# Altium PCB PCB3.PcbDoc
Units mm, origin at the board's own origin, x right, y up, seen from the top; angles counter-clockwise.
Board outline 85.6 x 53.98 mm, 2 copper layers (Top Layer, Bottom Layer); 38 components, 37 nets, 141 pads, 95 vias.
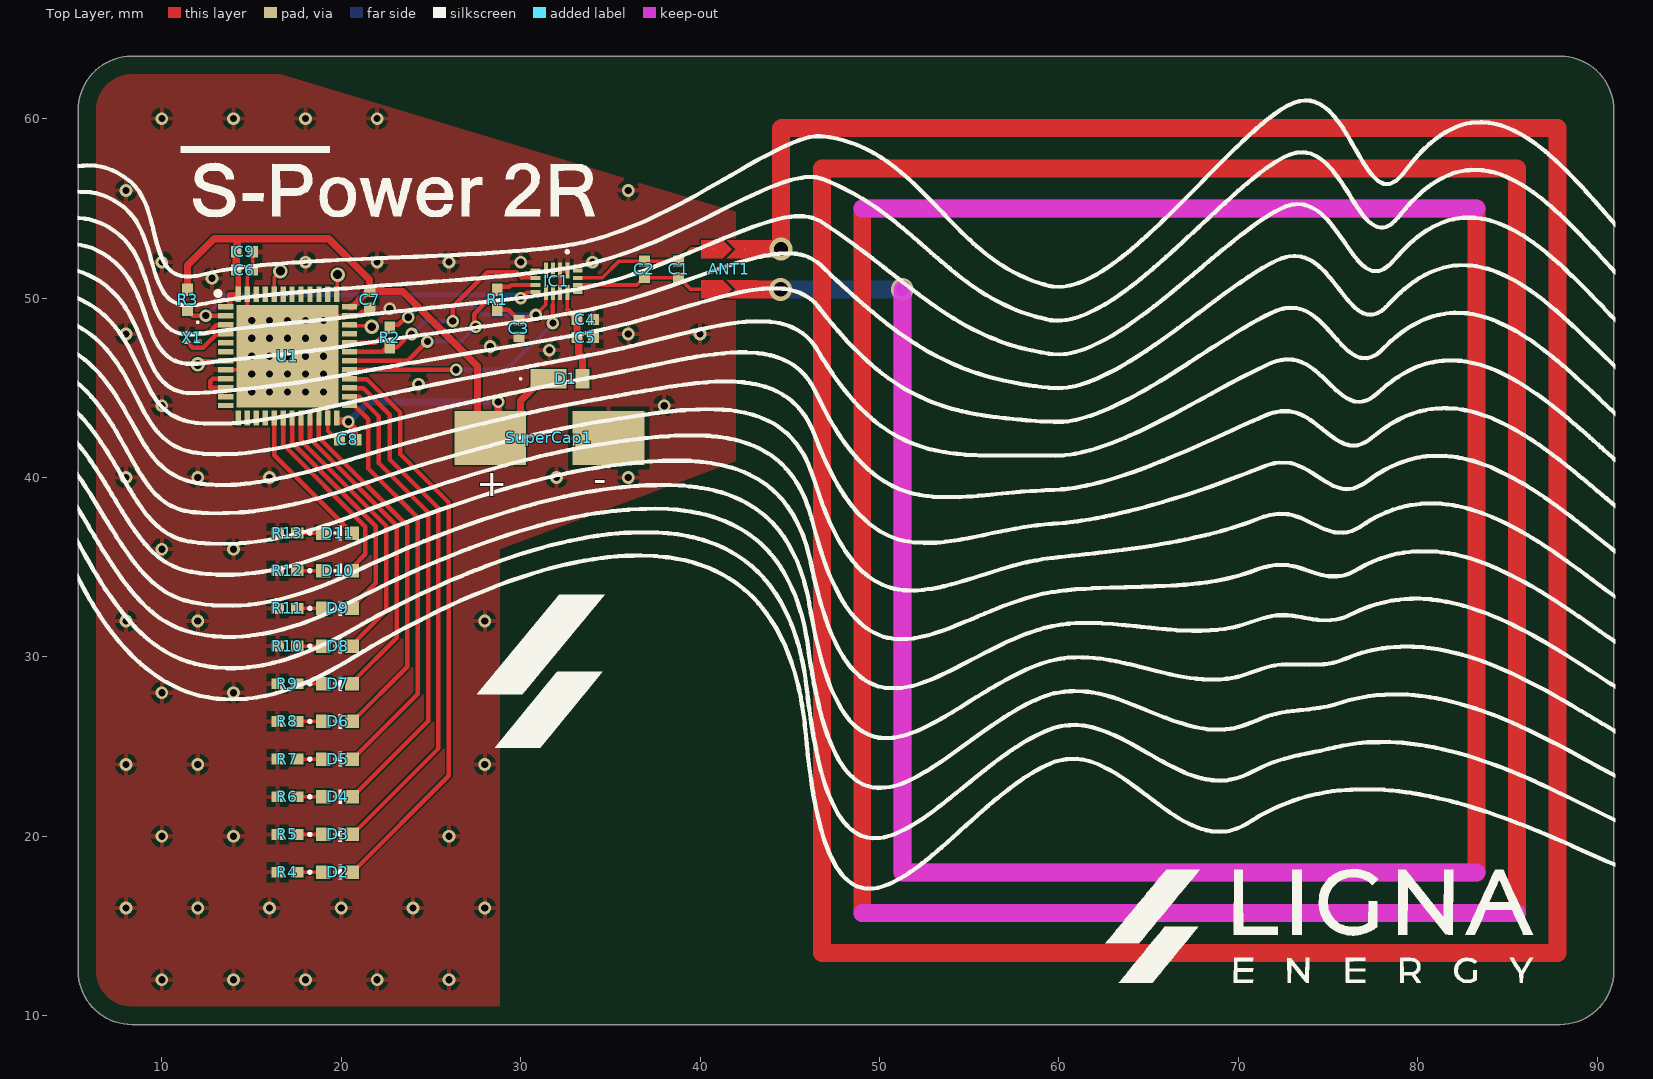
[diagram p0: Top Layer view]
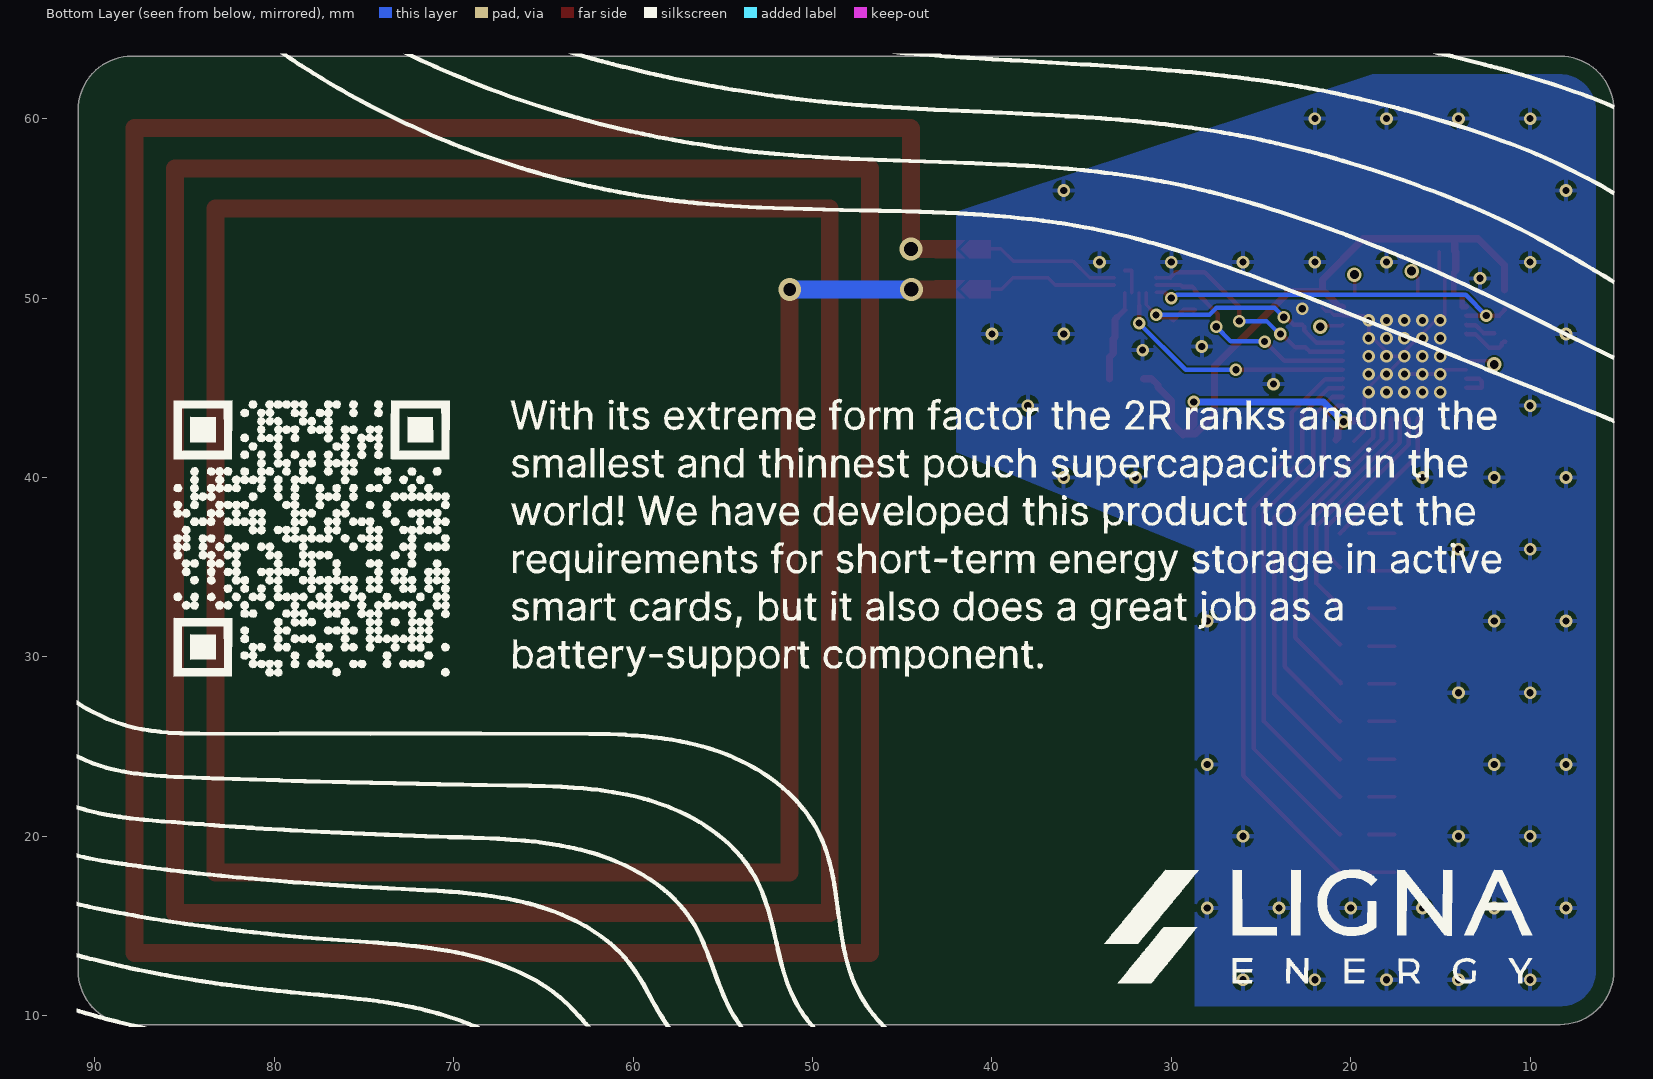
[diagram p1: Bottom Layer view, seen from below]

## Layer stack, top to bottom
Top Solder: solder mask 0.0102, Solder Resist, Dk 3.5
Top Layer: signal copper 0.0356
Dielectric 1: dielectric 0.32, FR-4, Dk 4.8
Bottom Layer: signal copper 0.0356
Bottom Solder: solder mask 0.0102, Solder Resist, Dk 3.5

## Board outline
8.334,9.503 cw(c8.334,12.503) 5.334,12.503 5.334,60.483 cw(c8.334,60.483) 8.334,63.483 87.934,63.483 cw(c87.934,60.483) 90.934,60.483 90.934,12.503 cw(c87.934,12.503) 87.934,9.503

## Design rules (kind name [scope] priority, off if disabled: settings)
BoardOutlineClearance [All] p1: gap=1 ignorepadtopadclearanceinfootprint=FALSE
Clearance [All] p1: gap=0.1 ignorepadtopadclearanceinfootprint=TRUE
PolygonConnect [All] p1: connectstyle=Relief reliefconductorwidth=0.254 reliefentries=4 polygonreliefangle="90 Angle" airgapwidth=0.254
RoutingVias [All] p1: holewidth=0.711 width=1.27 viastyle="Through Hole" minholewidth=0.4 minwidth=0.7 maxholewidth=0.711 maxwidth=1.7
SolderMaskExpansion [All] p1: expansion=0.102 istentingtop=FALSE
Width [All] p1: maxlimit=0.4 minlimit=0.1 preferedwidth=0.254
30 further rules are at their usual default settings.

## Components (designator, comment, footprint, x,y, rotation, side; value= is the part's Value field where it differs from the comment)
ANT1 "NFC-antenna" antenna3 40.789,59.481 r0 top
C1 "GRM155C81C474KE01D" CAPC1005X70N 38.8,51.6 r270 top value=0F
C2 "GRM155C81C474KE01D" CAPC1005X70N 36.9,51.6 r270 top value=0F
C3 "GRM155R61E105KA12D" CAPC1005X55N 29.9,48.3 r270 top value=1µF
C4 "C0402C101KCGACAUTO" CAPC1005X70N 33.6,48.8 r180 top
C5 "C0402C101KCMBASJ105SB7474KFNA01GACAUTO" CAPC1005X70N 33.6,47.8 r180 top
C6 "C0402C475K8PACTU" CAPC1005X70N 14.605,51.562 r0 top
C7 "MLAST105SB5104KFNA01" CAPC1005X70N 21.59,49.911 r270 top
C8 "MLAST105SB5104KFNA01" CAPC1005X70N 20.36,42.1 r180 top
C9 "MLAST105SB5104KFNA01" CAPC1005X70N 14.605,52.578 r0 top
D1 "RBE01VYM6AFHTR" RBE01VYM6AFHTR 32.2,45.5 r270 top
D2 "150060RS55040" WL-SMCD_0603 1289.8,1288 r0 top
D3 "150060RS55040" WL-SMCD_0603 1289.8,1290.1 r0 top
D4 "150060AS55040" WL-SMCD_0603 1289.8,1292.2 r0 top
D5 "150060AS55040" WL-SMCD_0603 1289.8,1294.3 r0 top
D6 "150060AS55040" WL-SMCD_0603 1289.8,1296.4 r0 top
D7 "150060VS55040" WL-SMCD_0603 1289.8,1298.5 r0 top
D8 "150060VS55040" WL-SMCD_0603 1289.8,1300.6 r0 top
D9 "150060VS55040" WL-SMCD_0603 1289.8,1302.7 r0 top
D10 "150060VS55040" WL-SMCD_0603 1289.8,1304.8 r0 top
D11 "150060BS55040" WL-SMCD_0603 1289.8,1306.9 r0 top
IC1 "NTP53321G0JHKZ" NTP53321G0JHKZ 32.004,50.927 r270 top
R1 "CRCW04024K70FKEDHP" RESC1005X40N 28.7,49.9 r270 top
R2 "CRCW04024K70FKEDHP" RESC1005X40N 22.7,47.8 r90 top
R3 "CRCW04024K70FKEDHP" RESC1005X40N 11.43,49.911 r90 top
R4 "SFR01MZPJ470" RESC1005X40N 17,18 r0 top
R5 "SFR01MZPJ470" RESC1005X40N 17,20.1 r0 top
R6 "SFR01MZPJ470" RESC1005X40N 17,22.2 r180 top
R7 "SFR01MZPJ470" RESC1005X40N 17,24.3 r180 top
R8 "SFR01MZPJ470" RESC1005X40N 17,26.4 r180 top
R9 "SFR01MZPJ470" RESC1005X40N 17,28.5 r180 top
R10 "SFR01MZPJ470" RESC1005X40N 17,30.6 r180 top
R11 "SFR01MZPJ470" RESC1005X40N 17,32.7 r180 top
R12 "SFR01MZPJ470" RESC1005X40N 17,34.8 r180 top
R13 "SFR01MZPJ470" RESC1005X40N 17,36.9 r180 top
SuperCap1 "Ligna Energy" "S-Power 2R slim" 31.3,40.2 r0 top locked
U1 "STM32L431CCU6" QFN50P700X700X60-49N-D 17.006,46.757 r0 top locked
X1 "WMRAG32K76CS2C00R0" WMRAG32K76CS2C00R0 11.7,47.8 r180 top

## Footprints (in the part's own frame and the unit in brackets; to place one, negate y for a bottom-side part, rotate by r counter-clockwise, add the part's x,y. Pads: shape width x height; smd on the part's side, far side on the other; paste and mask are expansions set on the pad)
antenna3 [mm]
  round 0.025 smd: 0(1.7,-9) 0(1.7,-6.75) 1(-0.025,-6.75) 2(-0.025,-9)
  Top Layer region: -0.725,-6.25 -0.725,-7.25 0.475,-7.25 0.975,-6.75 0.475,-6.25
  Top Layer region: 2.4,-7.25 2.4,-6.25 0.7,-6.25 1.2,-6.75 0.7,-7.25
  Top Layer region: -0.725,-8.5 -0.725,-9.5 0.475,-9.5 0.975,-9 0.475,-8.5
  Top Layer region: 2.4,-9.5 2.4,-8.5 0.7,-8.5 1.2,-9 0.7,-9.5
  Top Layer lines w1: 1.7,-9 3.7,-9 ; 1.725,-6.75 3.725,-6.75 3.725,-0.025 ; 3.75,0 47,0 47,-46 6,-46 6,-2.25 44.75,-2.25 44.75,-43.75 8.25,-43.75 8.25,-4.5 42.5,-4.5 42.5,-41.5 10.5,-41.5 10.5,-9
  Top Layer keep-out lines w1: 8.25,-43.75 44.75,-43.75 ; 8.25,-4.5 42.5,-4.5 ; 10.5,-9 10.5,-41.5 42.5,-41.5
  Bottom Layer lines w1: 3.7,-9 10.475,-9
CAPC1005X55N [mm]
  rect 0.6x0.62 smd: 1(-0.46,0) 2(0.46,0)
  body extent -0.5,-0.25 0.5,0.25, height 0.25
CAPC1005X70N [mm]
  rect 0.6x0.62 smd: 1(-0.46,0) 2(0.46,0)
  body extent -0.5,-0.25 0.5,0.25, height 0.5
NTP53321G0JHKZ [mm]
  rect 0.9x0.22 smd: 1(-0.6,0.6)
  rect 0.85x0.22 smd: 2(-0.625,0.2) 3(-0.625,-0.2) 4(-0.625,-0.6) 9(0.625,-0.6) 10(0.625,-0.2) 11(0.625,0.2) 12(0.625,0.6)
  rect 0.22x0.55 smd: 5(-0.6,-1.175) 6(-0.2,-1.175) 7(0.2,-1.175) 8(0.6,-1.175) 13(0.6,1.175) 14(0.2,1.175) 15(-0.2,1.175) 16(-0.6,1.175)
  silkscreen extent -1.7,0.55 -1.6,0.65, body extent -0.9,-1.3 0.9,1.3, height 0.6
QFN50P700X700X60-49N-D [mm]
  rect 0.85x0.3 smd: 1(-3.45,2.75) 2(-3.45,2.25) 3(-3.45,1.75) 4(-3.45,1.25) 5(-3.45,0.75) 6(-3.45,0.25) 7(-3.45,-0.25) 8(-3.45,-0.75) 9(-3.45,-1.25) 10(-3.45,-1.75) 11(-3.45,-2.25) 12(-3.45,-2.75) 25(3.45,-2.75) 26(3.45,-2.25) 27(3.45,-1.75) 28(3.45,-1.25) 29(3.45,-0.75) 30(3.45,-0.25) 31(3.45,0.25) 32(3.45,0.75) 33(3.45,1.25) 34(3.45,1.75) 35(3.45,2.25) 36(3.45,2.75)
  rect 0.3x0.85 smd: 13(-2.75,-3.45) 14(-2.25,-3.45) 15(-1.75,-3.45) 16(-1.25,-3.45) 17(-0.75,-3.45) 18(-0.25,-3.45) 19(0.25,-3.45) 20(0.75,-3.45) 21(1.25,-3.45) 22(1.75,-3.45) 23(2.25,-3.45) 24(2.75,-3.45) 37(2.75,3.45) 38(2.25,3.45) 39(1.75,3.45) 40(1.25,3.45) 41(0.75,3.45) 42(0.25,3.45) 43(-0.25,3.45) 44(-0.75,3.45) 45(-1.25,3.45) 46(-1.75,3.45) 47(-2.25,3.45) 48(-2.75,3.45)
  rect 5.7x5.7 smd: 49(0,0)
  silkscreen extent -4,3.38 -3.75,3.62, body extent -3.55,-3.55 3.55,3.55, height 0.6
RBE01VYM6AFHTR [mm]
  rect 1.1x2 smd: 1(0,-0.65)
  rect 1.1x0.8 smd: 2(0,1.25)
  silkscreen extent -0.05,-2.25 0.05,-2.15, body extent -0.7,-1.25 0.7,1.25, height 0.8
RESC1005X40N [mm]
  rect 0.7x0.6 smd: 1(-0.55,0) 2(0.55,0)
  body extent -0.5,-0.25 0.5,0.25, height 0.4
"S-Power 2R slim" [mm]
  rect 4x3 smd: 1(-3,2) 2(3.6,2)
  silkscreen extent -3.72,-15.26 3.38,-6.73
WL-SMCD_0603 [mm] "SMD Mono-color Chip LED, body 1.6x0.8mm"
  rect 0.8x0.75 smd: 1(-1270.8,-1270) 2(-1269.2,-1270)
  silkscreen extent -1271.62,-1270.4 -1269.78,-1269.6, body extent -1270.8,-1270.4 -1269.2,-1269.6, height 0.42
WMRAG32K76CS2C00R0 [mm]
  rect 0.4x0.25 smd: 1(-0.3,-0.225) 2(0.3,-0.225) 3(0.3,0.225) 4(-0.3,0.225)
  silkscreen extent -0.35,-0.9 -0.25,-0.8, body extent -0.48,-0.33 0.48,0.33, height 0.45

## Part data
C1 C2: library part CMP-001-00140-1, "Multilayer Ceramic Capacitors MLCC - SMD/SMT", Manufacturer_Name="Murata Electronics", Mouser Part Number=81-GRM155C81C474KE1D, Datasheet Link=https://search.murata.co.jp/Ceramy/image/img/A01X/G101/ENG/GRM155C81C474KE01-01A.pdf, Design Item ID=GRM155C81C474KE01D, Height=0.7mm, Manufacturer_Part_Number=GRM155C81C474KE01D, Mouser Price/Stock=https://www.mouser.com/Search/Refine.aspx?Keyword=81-GRM155C81C474KE1D, Source=SamacSys.SchLib
C3: library part CMP-001-00126-1, "Capacitor", Manufacturer_Name="Murata Electronics", Mouser Part Number=81-GRM155R61E105KA2D, Rated Voltage="25 VDC", Arrow Part Number=GRM155R61E105KA12D, Arrow Price/Stock=https://www.arrow.com/en/products/grm155r61e105ka12d/murata-manufacturing?region=nac, Datasheet Link=https://search.murata.co.jp/Ceramy/image/img/A01X/G101/ENG/GRM155R61E105KA12-01A.pdf, Design Item ID=GRM155R61E105KA12D, Height=0.55mm, Manufacturer_Part_Number=GRM155R61E105KA12D, Mouser Price/Stock=https://www.mouser.co.uk/ProductDetail/Murata-Electronics/GRM155R61E105KA12D?qs=hiffU4J9V6bE4a81t2Mv5A%3D%3D, Source=SamacSys.SchLib
C4: library part "Generic capacitor", "Multilayer Ceramic Capacitors MLCC - SMD/SMT 500V 0.0001uF C0G 0402 10% AEC-Q200", Capacitance=100pF, ComponentLink1Description="New link", ComponentLink1URL=https://www.mouser.se/ProductDetail/KEMET/C0402C101KCGACAUTO?qs=1Kr7Jg1SGW8kQysZZQPmCw%3D%3D
C5: library part "Generic capacitor", "Multilayer Ceramic Capacitors MLCC - SMD/SMT 500V 0.0001uF C0G 0402 10% AEC-Q200", Capacitance=0.47uF, ComponentLink1Description="New link", ComponentLink1URL=https://www.mouser.se/ProductDetail/TAIYO-YUDEN/MBASJ105SB7474KFNA01?qs=tlsG%2FOw5FFh70%252Bw5vm%252Bxgg%3D%3D
C6: library part "Generic capacitor", "Multilayer Ceramic Capacitors MLCC - SMD/SMT", Capacitance=4.7uF, ComponentLink1Description="New link", ComponentLink1URL=https://www.mouser.se/ProductDetail/TAIYO-YUDEN/MLASJ105BB5475MFNA01?qs=sGAEpiMZZMsh%252B1woXyUXj3XUfju0vRpjpyIV14TsoXE%3D
C7 C8 C9: library part "Generic capacitor", "Multilayer Ceramic Capacitors MLCC - SMD/SMT 25V 0.1uF X5R 0402 10% Medical", Capacitance=100nF, ComponentLink1Description="New link", ComponentLink1URL=https://www.mouser.se/ProductDetail/TAIYO-YUDEN/MLAST105SB5104KFNA01?qs=sGAEpiMZZMsh%252B1woXyUXj3XUfju0vRpjIEu19pL458I%3D
D1: library part CMP-004-00062-1, "DIODE SCHOTTKY 6V 100MA TUMD2M", Manufacturer_Name="ROHM Semiconductor", Mouser Part Number=755-RBE01VYM6AFHTR, Datasheet Link=https://www.digikey.ph/en/products/detail/rohm-semiconductor/RBE01VYM6AFHTR/24634517, Design Item ID=RBE01VYM6AFHTR, Height=0.8mm, Manufacturer_Part_Number=RBE01VYM6AFHTR, Mouser Price/Stock=https://www.mouser.co.uk/ProductDetail/ROHM-Semiconductor/RBE01VYM6AFHTR?qs=VVKQmw408U8czvswzPLZtQ%3D%3D, Source=SamacSys.SchLib
D2 D3: library part CMP-207942-000007-3, "LED RED DIFFUSED 0603 SMD", Case/Package=0603, Color=Red, Forward Current=40mA, Forward Voltage=2V, Max Junction Temperature (Tj)=115°C, Max Operating Temperature=85°C, Max Reverse Voltage (DC)=5V, Min Operating Temperature=-40°C, Power Dissipation=48mW, Dominant Wavelength=624nm, Height=400µm, Length=1.6mm, Luminous Intensity=90mcd, NexarPartId=90235565, Packaging="Tape and Reel", Peak Wavelength=632nm, Reverse Voltage=5V, RoHS=Compliant, Viewing Angle=140°, Wavelength=624nm, Width=800µm
D4 D5 D6: library part CMP-03913-134708025-1, "150060AS55040 WL-SMCD SMT Mono-color Chip LED Diffused", Forward Current=40mA, Forward Voltage=2V, Max Operating Temperature=85°C, Max Reverse Voltage (DC)=5V, Min Operating Temperature=-40°C, Dominant Wavelength=605nm, Luminous Intensity=110mcd, NexarPartId=134708025, Peak Wavelength=609nm, Viewing Angle=140°
D7 D8 D9 D10: library part CMP-03913-90235568-2, "150060VS55040 WL-SMCD SMT Mono-color Chip LED Diffused", Case/Package=0603, Color=Green, Forward Current=40mA, Forward Voltage=2V, Max Junction Temperature (Tj)=115°C, Max Operating Temperature=85°C, Max Reverse Voltage (DC)=5V, Min Operating Temperature=-40°C, Power Dissipation=48mW, Dominant Wavelength=573nm, Height=400µm, Length=1.6mm, Luminous Intensity=60mcd, NexarPartId=90235568, Packaging="Tape and Reel", Peak Wavelength=575nm, Reverse Voltage=5V, RoHS=Compliant, Viewing Angle=140°, Wavelength=573nm, Width=800µm
D11: library part CMP-03913-90235561-2, "150060BS55040 WL-SMCD SMT Mono-color Chip LED Diffused", Forward Current=60mA, Forward Voltage=3.2V, Max Operating Temperature=85°C, Max Reverse Voltage (DC)=5V, Min Operating Temperature=-40°C, Dominant Wavelength=470nm, Height=400µm, Length=1.6mm, Luminous Intensity=80mcd, NexarPartId=90235561, Packaging="Tape and Reel", Peak Wavelength=465nm, RoHS=Compliant, Viewing Angle=140°, Wavelength=470nm, Width=800µm
IC1: library part CMP-031-00011-1, "Interface - Specialized NTAG", Manufacturer_Name=NXP, Mouser Part Number=771-NTP53321G0JHKZ, Arrow Part Number=NTP53321G0JHKZ, Arrow Price/Stock=https://www.arrow.com/en/products/ntp53321g0jhkz/nxp-semiconductors?region=nac, Datasheet Link=https://www.nxp.com/docs/en/data-sheet/NTP53x2.pdf, Design Item ID=NTP53321G0JHKZ, Height=0.5mm, Manufacturer_Part_Number=NTP53321G0JHKZ, Mouser Price/Stock=https://www.mouser.co.uk/ProductDetail/NXP-Semiconductors/NTP53321G0JHKZ?qs=u16ybLDytRYy2Rt%2Fib73Dw%3D%3D, Source=SamacSys.SchLib
R1 R2 R3: library part CMP-009-00230-1, "CRCW Power Resistor 0402 0.063W 4K7 Vishay CRCW Series Thick Film Power Resistor 0402 Case 4.7k +/-1% 0.125W +/-100ppm/K", Manufacturer_Name=Vishay, Mouser Part Number=71-CRCW04024K70FKEDH, Resistance=4.7k, Arrow Part Number=CRCW04024K70FKEDHP, Arrow Price/Stock=https://www.arrow.com/en/products/crcw04024k70fkedhp/vishay?utm_currency=USD&region=nac, Datasheet Link=http://www.vishay.com/docs/20035/dcrcwe3.pdf, Design Item ID=CRCW04024K70FKEDHP, Height=0.4mm, Manufacturer_Part_Number=CRCW04024K70FKEDHP, Mouser Price/Stock=https://www.mouser.co.uk/ProductDetail/Vishay-Dale/CRCW04024K70FKEDHP?qs=k2%2FDWSARqgH3ASlI4vM3KQ%3D%3D, Source=SamacSys.SchLib
R4 R5 R6 R7 R8 R9 R10 R11 R12 R13: library part "Generic resistor", "Thick Film Resistors Sulfur Tolerant Chip Resistors 0402 case size", Resistance=47, ComponentLink1Description="New link", ComponentLink1URL=https://www.mouser.se/ProductDetail/ROHM-Semiconductor/SFR01MZPJ470?qs=sGAEpiMZZMvdGkrng054t2cqbZCzJY7NKh3gUwXOa5kuN5TNJ%252Bi2TA%3D%3D
SuperCap1: library part "S-Power 2R"
U1: library part CMP-031-00018-1, "ARM Microcontrollers - MCU 16/32-BITS MICROS", Manufacturer_Name=STMicroelectronics, Mouser Part Number=511-STM32L431CCU6, Arrow Part Number=STM32L431CCU6, Arrow Price/Stock=https://www.arrow.com/en/products/stm32l431ccu6/stmicroelectronics?region=nac, Datasheet Link=http://www.st.com/content/ccc/resource/technical/document/datasheet/group3/83/b3/60/f6/b1/cc/47/7e/DM00257211/files/DM00257211.pdf/jcr:content/translations/en.DM00257211.pdf, Design Item ID=STM32L431CCU6, Height=0.6mm, Manufacturer_Part_Number=STM32L431CCU6, Mouser Price/Stock=https://www.mouser.co.uk/ProductDetail/STMicroelectronics/STM32L431CCU6?qs=U58vgkJzipRWiXTJcDrRbg%3D%3D, Source=SamacSys.SchLib
X1: library part CMP-003-00031-1, "32.768 kHz +/-20ppm Crystal 8pF 75 kOhms 4-SMD", Manufacturer_Name="Murata Electronics", Mouser Part Number=81-WMRAG32K76CS2C00R, Datasheet Link=https://www.murata.com/products/productdata/8804604674078/SPEC-WMRAG32K76CS2C00R0.pdf, Design Item ID=WMRAG32K76CS2C00R0, Height=0.35mm, Manufacturer_Part_Number=WMRAG32K76CS2C00R0, Mouser Price/Stock=https://www.mouser.co.uk/ProductDetail/Murata-Electronics/WMRAG32K76CS2C00R0?qs=bZr6mbWTK5kWV2uyypDEfg%3D%3D, Source=SamacSys.SchLib

## Via types
v1: diameter 0.711, hole 0.4, Top Layer to Bottom Layer, tented both sides, 48 vias
v2: diameter 0.7, hole 0.4, Top Layer to Bottom Layer, tented both sides, 40 vias
v3: diameter 0.8, hole 0.5, Top Layer to Bottom Layer, 4 vias
v4: diameter 1.27, hole 0.8, Top Layer to Bottom Layer, 2 vias
v5: diameter 1.27, hole 0.711, Top Layer to Bottom Layer, tented both sides, 1 vias

## Nets (pads, with @x,y where several pads share a name; then routed paths per layer and width w, separated by ;. In a path a pad name is that pad's centre, name@x,y a point inside that pad or via, vN(x,y) a via of type N, cw(c..) or ccw(c..) an arc to the next point about the centre after c; other vN are vias at no path point)
A_en: U1.9 U1.10 | length 2.1
  Top Layer w0.25: U1.10 12.707,45.007 12.7,45 12.7,45.361 12.846,45.507 U1.9
ANT+: ANT1.2 C1.2 C2.2 IC1.14 | length 8
  Top Layer w0.2: IC1.14 36.477,50.727 36.89,51.14 C2.2 C1.2 38.81,51.14 39.45,50.5 40.7,50.5
ANT-: ANT1.1 C1.1 C2.1 IC1.15 | length 8.2
  Top Layer w0.2: IC1.15 34.55,51.127 35.484,52.06 C2.1 C1.1 38.81,52.06 39.5,52.75 40.725,52.75
BOOT0: U1.44 | length 1.4
  Top Layer w0.2: U1.44 16.256,51.156 v3(16.6,51.5)
D0: D2.2 U1.28 | length 32.6
  Top Layer w0.254: U1.28 20.479,45.484 21.416,45.484 23.3,43.6 23.3,41.3 26,38.6 26,23.375 20.625,18 D2.2
D1: D3.2 U1.27 | length 29.4
  Top Layer w0.254: U1.27 20.479,44.984 21.216,44.984 22.7,43.5 22.7,41 25.418,38.282 25.418,24.893 20.625,20.1 D3.2
D2: D4.2 U1.26 | length 26.2
  Top Layer w0.254: U1.26 20.479,44.484 21.016,44.484 22.1,43.4 22.1,40.8 24.836,38.064 24.836,26.411 D4.2@20.625,22.2 ; D4.2@20.625,22.2 D4.2 D4.2@20.625,22.2
D3: D5.2 U1.25 | length 23
  Top Layer w0.254: U1.25 20.731,44.007 21.5,43.238 21.5,40.5 24.255,37.745 24.255,27.93 20.625,24.3 D5.2
D4: D6.2 U1.22 | length 20.2
  Top Layer w0.254: U1.22 18.756,42.217 23.673,37.3 23.673,29.448 20.625,26.4 D6.2
D5: D7.2 U1.21 | length 17.8
  Top Layer w0.254: U1.21 18.256,42.152 23.091,37.317 23.091,31.066 D7.2@20.625,28.6 ; D7.2@20.562,28.537 D7.2@20.625,28.6 ; D7.2@20.6,28.6 D7.2@20.625,28.6
D6: D8.2 U1.20 | length 15.4
  Top Layer w0.254: U1.20 17.756,42.044 22.509,37.291 22.509,32.584 20.625,30.7 D8.2@20.6,30.7
D7: D9.2 U1.19 | length 13
  Top Layer w0.254: U1.19 17.256,41.944 17.27,41.944 21.928,37.286 21.928,34.114 ; D9.2@20.6,32.8 20.625,32.8 20.873,33.048 20.873,33.073 21.914,34.114
D8: D10.2 U1.18 | length 10.5
  Top Layer w0.254: U1.18 16.756,41.844 21.346,37.254 21.346,35.721 20.625,35 D10.2@20.6,35
D9: D11.2 U1.17 | length 8.2
  Top Layer w0.254: U1.17 16.256,41.244 20.327,37.173 20.327,37.148 20.575,36.9 D11.2
ED: IC1.8 R3.1 U1.2 | length 21.3
  Top Layer w0.2: 30.373,50.327 IC1.8
  Top Layer w0.254: R3.1 11.43,49.311 11.734,49.007 U1.2 ; v2(30,50) 30.046,50 30.339,50.293
  Bottom Layer w0.254: v2(12.446,49.022) 13.597,50.173 29.706,50.173 29.879,50 v2(30,50)
EH: C4.2 C5.2 D1.2 IC1.12 | length 5.2
  Top Layer w0.2: 32.604,49.336 IC1.12
  Top Layer w0.3: 32.604,49.336 C4.2@33.03,48.91
  Top Layer w0.4: C4.2@33.03,48.91 33.04,48.91 33.14,48.81 C4.2 C5.2 33.24,47.7 33.24,46.91 33.45,46.7 D1.2
GND: C3.2 C4.1 C5.1 C6.2 C7.2 C8.2 C9.2 IC1.1 IC1.2 IC1.11 R4.1 R5.1 R6.2 R7.2 R8.2 R9.2 R10.2 R11.2 R12.2 R13.2 SuperCap1.2 U1.8 U1.23 U1.35 U1.47 U1.49 X1.2 | length 23.9
  Top Layer w0.2: U1.8 14.756,46.007 v2(15.006,45.757) ; U1.49@15.006,45.764 U1.49@16.762,45.764 ; v2(15.006,48.757) 14.756,49.007 14.756,51.243 15.065,51.552 C6.2 C9.2 ; U1.49@15.262,48.764 U1.49@17.138,46.889 ; U1.49@17.881,46.883 U1.49@18.881,47.883 ; v2(18.006,45.757) v2(17.006,46.757) v2(18.006,46.757) ; U1.49@18.138,45.889 U1.49@19.138,44.889 ; v2(19.006,44.757) 19.256,44.507 19.256,42.584 C8.2@19.64,42.2 ; v2(19.006,47.757) v2(19.006,48.757) 19.256,49.007 U1.35 20.506,49.057 20.943,49.057 21.146,49.26 21.399,49.26 C7.2 ; C8.2@19.64,42.21 C8.2@19.64,42.2 ; C8.2@19.82,42.02 C8.2@19.64,42.2 ; IC1.11 IC1.2@32.204,51.547 ; IC1.2 IC1.2@32.204,51.547 ; IC1.1 32.594,51.537 32.214,51.537 IC1.2@32.204,51.547
  other v1: 10,12 14,12 18,12 22,12 26,12 8,16 12,16 16,16 20,16 24,16 28,16 10,20 14,20 26,20 8,24 12,24 28,24 10,28 14,28 8,32 12,32 28,32 10,36 14,36 8,40 12,40 16,40 32,40 36,40 10,44 38,44 24.3,45.2 8,48 36,48 40,48 12.8,51.1 10,52 18,52 22,52 26,52 30,52 34,52 8,56 36,56 10,60 14,60 18,60 22,60
  other v2: 15.006,44.757 16.006,44.757 17.006,44.757 18.006,44.757 16.006,45.757 17.006,45.757 19.006,45.757 15.006,46.757 16.006,46.757 19.006,46.757 31.6,47.1 28.3,47.3 15.006,47.757 16.006,47.757 17.006,47.757 18.006,47.757 16.006,48.757 17.006,48.757 18.006,48.757 22.7,49.4
HPD: IC1.10 U1.29 | length 14.1
  Top Layer w0.15: 31.8,49.6 31.804,49.604 IC1.10
  Top Layer w0.25: U1.29 20.46,46.003 26.397,46.003 v2(26.4,46) ; v2(31.8,48.6) 31.8,49.6
  Bottom Layer w0.25: v2(26.4,46) 29.2,46 v2(31.8,48.6)
JTCK-SWCLK: U1.37 | length 1.1
  Top Layer w0.2: U1.37 19.778,50.229 19.778,51.278 v3(19.8,51.3)
JTMS-SWDIO: U1.34 | length 1.3
  Top Layer w0.2: U1.34 20.506,48.457 21.643,48.457 v3(21.7,48.4)
NetD2_1: D2.1 R4.2 | length 1.4
  Top Layer w0.2: R4.2 D2.1
NetD3_1: D3.1 R5.2 | length 1.4
  Top Layer w0.2: R5.2 D3.1
NetD4_1: D4.1 R6.1 | length 1.4
  Top Layer w0.2: R6.1 D4.1
NetD5_1: D5.1 R7.1 | length 1.4
  Top Layer w0.2: R7.1 D5.1
NetD6_1: D6.1 R8.1 | length 1.4
  Top Layer w0.2: R8.1 D6.1
NetD7_1: D7.1 R9.1 | length 1.4
  Top Layer w0.2: R9.1 D7.1
NetD8_1: D8.1 R10.1 | length 1.4
  Top Layer w0.2: R10.1 D8.1
NetD9_1: D9.1 R11.1 | length 1.4
  Top Layer w0.2: R11.1 D9.1
NetD10_1: D10.1 R12.1 | length 1.4
  Top Layer w0.2: R12.1 D10.1
NetD11_1: D11.1 R13.1 | length 1.4
  Top Layer w0.2: R13.1 D11.1
NetP_0: U1.7 | length 1.6
  Top Layer w0.2: v3(12,46.3) 12.207,46.507 U1.7
NFC_Vcc: C3.1 IC1.9 R1.2 R2.2 U1.32 | length 15.5
  Top Layer w0.2: v2@30.874,49.226 31.011,49.226 31.404,49.619 IC1.9
  Top Layer w0.254: U1.32 21.912,47.507 22.481,48.077 22.481,48.081 22.602,48.202 22.602,48.402 22.702,48.502 23.181,48.502 23.611,48.931 v2(23.731,48.931) ; R1.2@28.761,49.289 R1.2 29.31,49.35 29.717,48.943 29.717,48.933 29.89,48.76 C3.1 30.067,48.927 30.591,48.927 30.727,49.062 v2(30.847,49.062)
  Bottom Layer w0.254: v2(23.731,48.931) 24.25,49.45 27.484,49.45 27.872,49.062 v2(30.847,49.062)
SCL1: IC1.7 R1.1 U1.30 | length 12.7
  Top Layer w0.2: 29.464,50.727 IC1.7
  Top Layer w0.25: U1.30 23.707,46.507 24.771,47.571 v2(24.8,47.571) ; v2(27.5,48.4) 27.4,48.5 27.4,49.1 28.7,50.4 28.7,50.5 28.838,50.638 29.375,50.638 29.464,50.727
  Bottom Layer w0.25: v2(24.8,47.571) 24.829,47.6 26.7,47.6 v2(27.5,48.4)
SDA1: IC1.6 R2.1 U1.31 | length 12.8
  Top Layer w0.2: 30.058,51.142 IC1.6@30.814,51.142
  Top Layer w0.25: U1.31 22.275,47.007 22.5,47.232 22.5,47.25 23.105,47.25 23.851,47.996 v2(23.918,47.996) ; v2(26.219,48.719) 26.219,49.519 28.135,51.435 29.765,51.435 30.058,51.142 ; IC1.6@30.814,51.142 IC1.6
  Bottom Layer w0.15: v2@26.191,48.691 v2(26.219,48.719)
  Bottom Layer w0.25: v2(23.918,47.996) 23.972,47.996 24.695,48.719 26.163,48.719 v2@26.191,48.691
Vcap: C6.1 C7.1 C8.1 C9.1 D1.1 R3.2 SuperCap1.1 U1.1 U1.24 U1.36 U1.48 | length 49
  Top Layer w0.3: U1.1 13.776,49.507 13.776,50.2 14.256,50.2 U1.48 14.256,51.441 C6.1@14.145,51.552
  Top Layer w0.4: R3.2 11.43,51.83 12.9,53.3 14.2,53.3 ; C6.1@14.145,51.552 C6.1 C9.1 14.2,52.633 14.2,53.3 ; U1.24@19.806,43.157 20.343,43.157 v2(20.4,43.1) 20.4,43.019 20.72,42.699 20.72,42.2 C8.1 ; U1.36 20.631,49.507 20.964,49.84 20.964,49.859 21.376,50.271 21.49,50.271 C7.1 ; v2(28.75,44.21) 28.75,42.95 SuperCap1.1@29.2,42.5 ; SuperCap1.1@29.133,42.433 28.667,42.433 27.6,43.5 27.6,46.2 23.429,50.371 C7.1 ; SuperCap1.1@29.333,42.367 29.994,43.028 29.994,44.271 30.75,45.027 30.75,45.15 31.1,45.5 D1.1 ; 14.2,53.3 19.3,53.3 21.58,51.02 21.58,50.381 C7.1
  Bottom Layer w0.4: v2(20.4,43.1) 21.51,44.21 v2(28.75,44.21)
XTAL32IN: U1.3 X1.1 | length 1.8
  Top Layer w0.25: X1.1 12.575,48.025 13.032,48.482 13.531,48.482 U1.3
XTAL32OUT: U1.4 X1.3 | length 2.7
  Top Layer w0.25: X1.3 11.475,47.575 11.575,47.475 11.575,47.357 11.707,47.225 12.293,47.225 13.05,47.982 13.531,47.982 U1.4
pads on no net: ANT1.0 IC1.3 IC1.4 IC1.5 IC1.13 IC1.16 U1.5 U1.6 U1.11 U1.12 U1.13 U1.14 U1.15 U1.16 U1.33 U1.38 U1.39 U1.40 U1.41 U1.42 U1.43 U1.45 U1.46 X1.4
copper on no net:
  other v4: 44.489,50.481 44.514,52.731
  other v5: 51.264,50.481

## Polygon pours and split planes (outlines as drawn)
GND on Bottom Layer "GND_L02_P000" (solid, remove dead copper, pour order 0): 42,54.8 42,41.4 28.7,36.004 28.7,6 0,6 0,68.7
GND on Top Layer "GND_L01_P001" (solid, remove dead copper, pour order 1): 42,54.8 42,40.9 28.822,35.991 28.822,6 0,6 0,67.5

## Silkscreen, mask and mechanical layers (free items; w line width, h text height)
Top Overlay:
  drawing of 38 lines, arcs and shapes, not listed
Bottom Overlay:
  drawing of 349 lines, arcs and shapes, not listed
Mechanical 1:
  lines w0.254: 90.934,9.5 90.934,12.503 ; 90.934,9.503 87.934,9.503 ; 5.334,60.483 cw(c8.334,60.483) 8.334,63.483 ; 5.334,60.483 5.334,12.503 ccw(c8.334,12.503) 8.334,9.503 87.934,9.503 ; 5.334,60.483 5.334,63.477 5.334,63.483 8.334,63.483 ; 8.334,63.483 87.934,63.483 cw(c87.934,60.483) 90.934,60.483 90.934,12.503 ; 87.934,9.503 ccw(c87.934,12.503) 90.934,12.503

## Text inside footprints (layer, text, board x,y; h text height)
SuperCap1: Top Overlay "+" at 27.529,38.95 h1.52; Top Overlay "-" at 34.054,39.167 h1.52